# EAGLE board Relay_Shield (EAGLE 8.0.0)
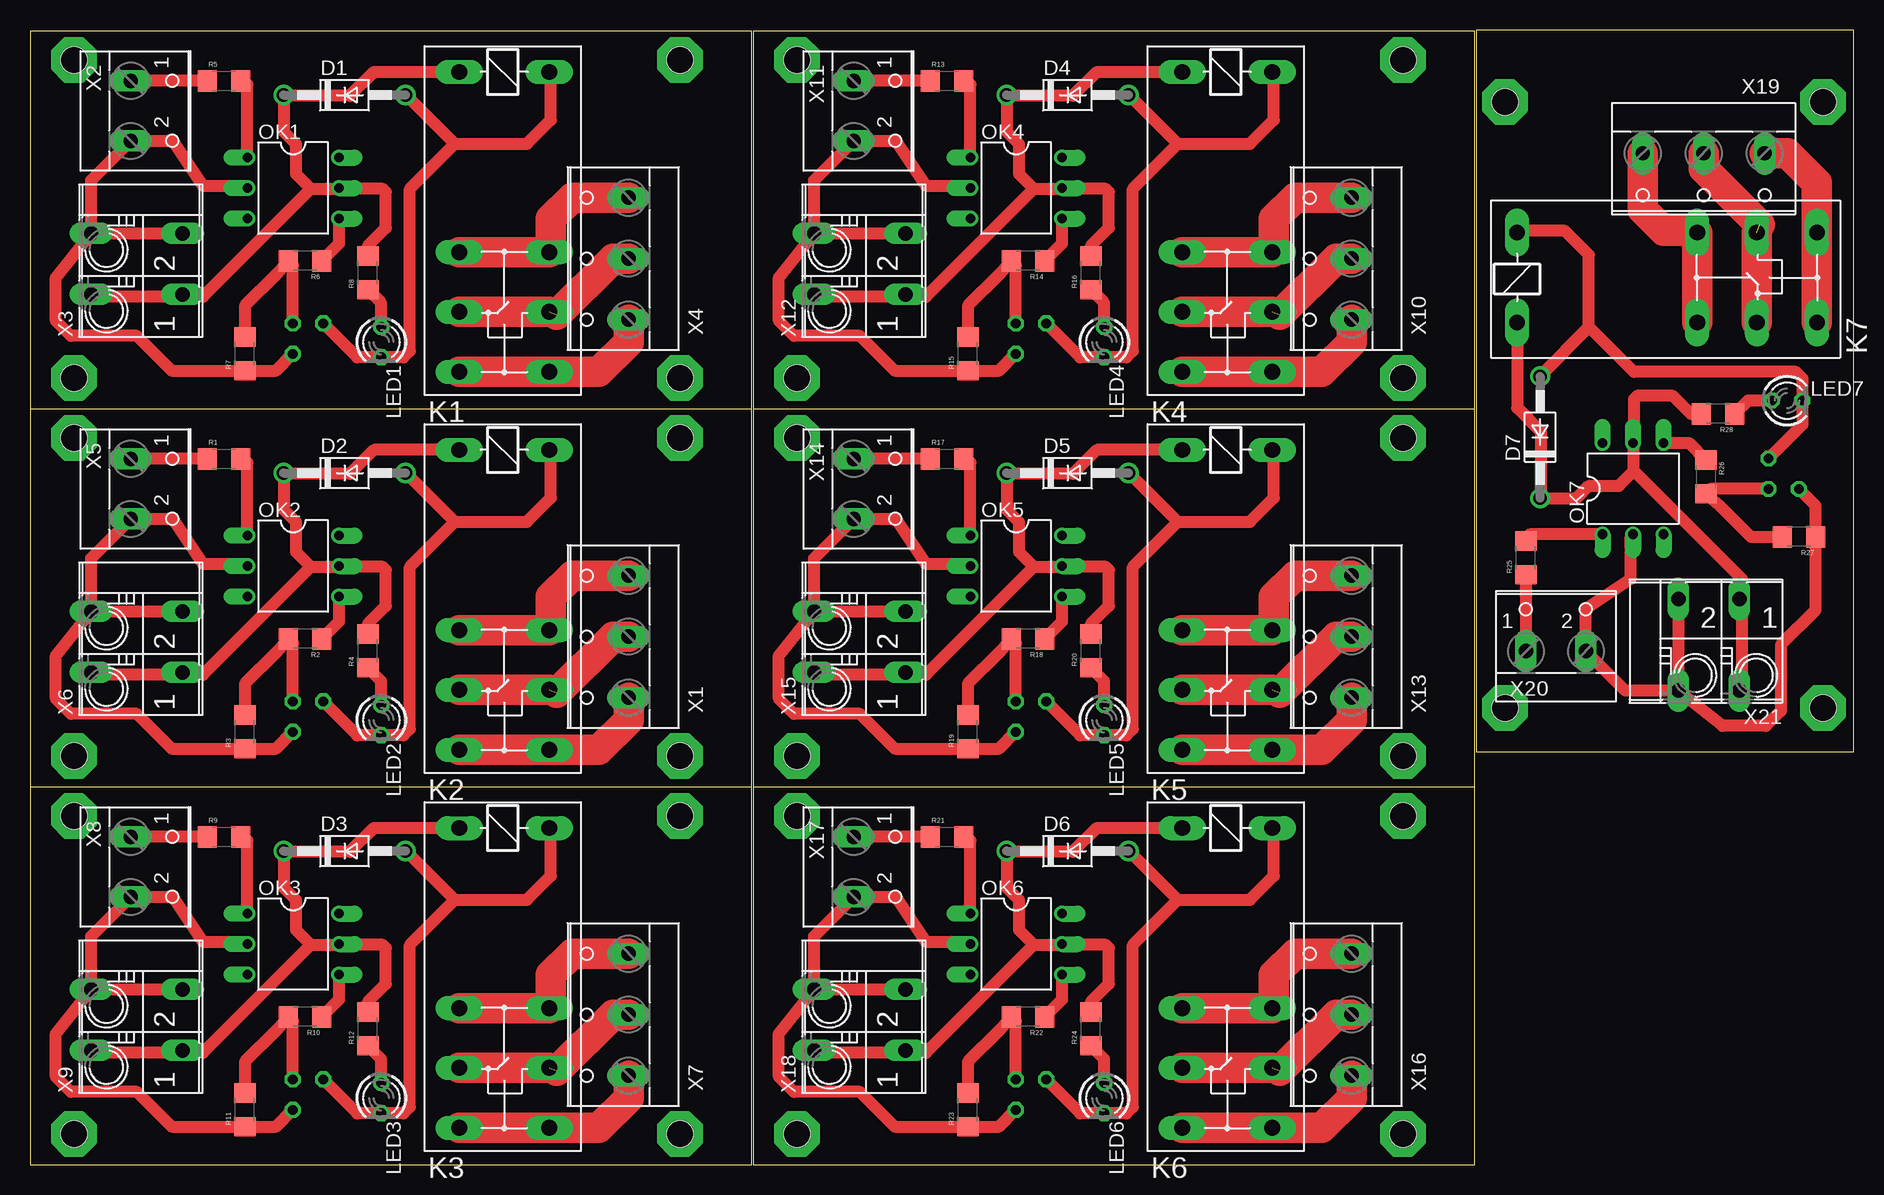
[diagram p0: board, top side]
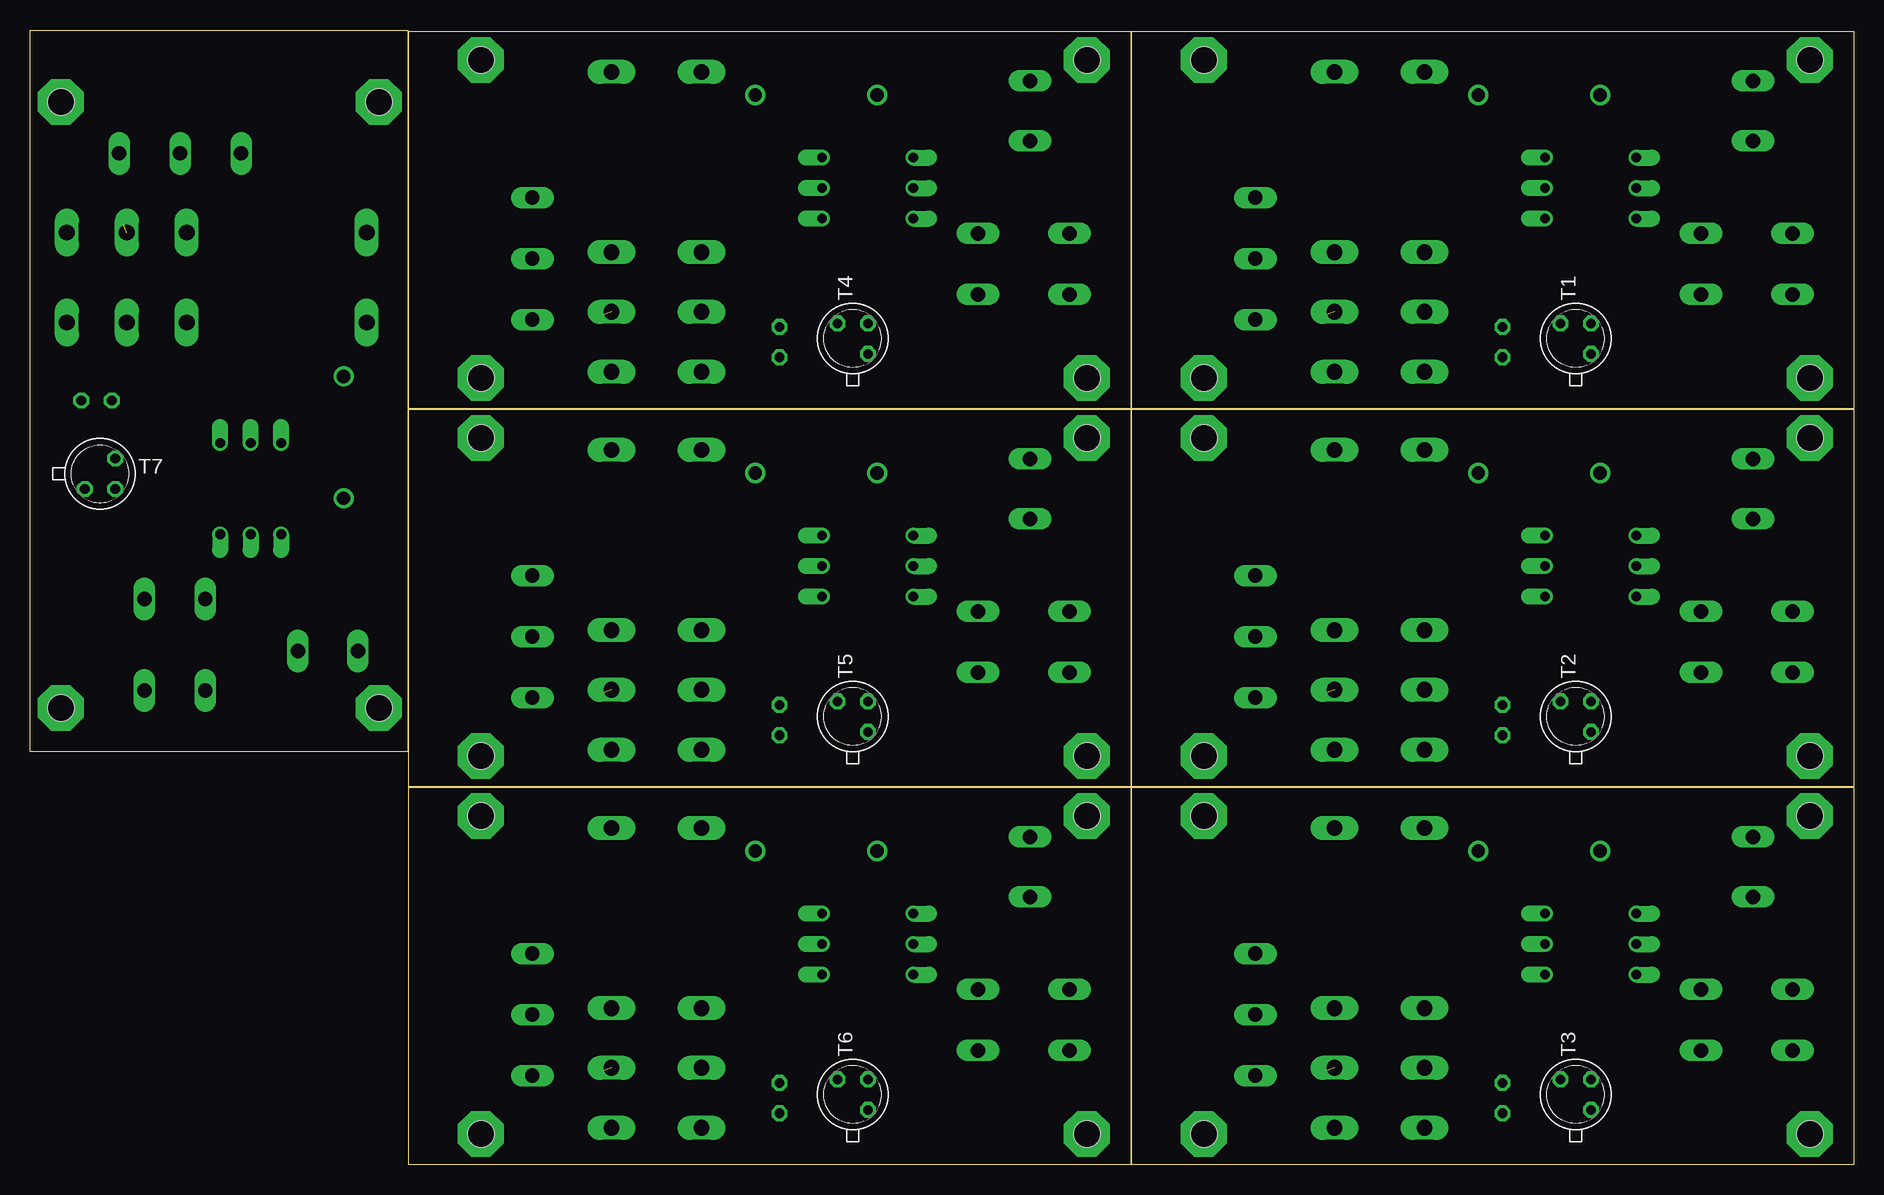
[diagram p1: board, bottom side, seen from below]

Size 151.98 x 94.56 mm. Coordinates in mm from the lower left corner, seen from the top.
Outline: 0,63 60.15,63 60.15,94.46 0,94.46 0,63
Outline: 0,31.5 60.15,31.5 60.15,62.96 0,62.96 0,31.5
Outline: 0,0 60.15,0 60.15,31.46 0,31.46 0,0
Outline: 60.25,63 120.4,63 120.4,94.46 60.25,94.46 60.25,63
Outline: 60.25,31.5 120.4,31.5 120.4,62.96 60.25,62.96 60.25,31.5
Outline: 60.25,0 120.4,0 120.4,31.46 60.25,31.46 60.25,0
Outline: 151.98,34.41 151.98,94.56 120.52,94.56 120.52,34.41 151.98,34.41
Copper layers (1*16): Top 0.035mm / dielectric 1.5mm / Bottom 0.035mm
Design rules "default *": minimum track width 10mil, minimum drill 24mil, track to track 15mil, track to pad 15mil, pad to pad 15mil, via to via 15mil, smd to smd 15mil, copper to edge 40mil, drill to drill 15mil, minimum pad ring 10mil, minimum via ring 8mil, stop-mask expansion 4mil, vias tented up to drill 0mil, thermal gap 10mil
Holes 2.2 mm at 54.16,92.07 54.16,65.57 3.66,65.57 3.66,92.07 54.16,60.57 54.16,34.07 3.66,34.07 3.66,60.57 54.16,29.07 54.16,2.57 3.66,2.57 3.66,29.07 114.41,92.07 114.41,65.57 63.91,65.57 63.91,92.07 114.41,60.57 114.41,34.07 63.91,34.07 63.91,60.57 114.41,29.07 114.41,2.57 63.91,2.57 63.91,29.07 122.91,88.57 149.41,88.57 149.41,38.07 122.91,38.07

## Footprints (pad centres in the part's own frame; a part is rotated, then mirrored left to right if it is on the bottom)
DO41-10 = drill 1.118: A 5.08,0; C -5.08,0
G2RE = drill 1.321 long: 1 -2.54,-3.683; 2 -2.54,3.81; O0 12.471,-3.683; O1 12.471,3.81; P0 17.45,-3.683; P1 17.45,3.81; S0 22.454,-3.683; S1 22.454,3.81
LED3MM = drill 0.813 octagon: A -1.27,0; K 1.27,0
DIL06 = drill 0.813 offset: 1 -2.54,-3.81; 2 0,-3.81; 3 2.54,-3.81; 4 2.54,3.81; 5 0,3.81; 6 -2.54,3.81
1206 = smd 1.6 x 1.8: 1 -1.4,0; 2 1.4,0
TO18 = drill 0.813 octagon: 1 -1.27,-1.27; 2 1.27,-1.27; 3 1.27,1.27
W237-3E = drill 1.194 long: 1 -5.08,-0.635; 2 0,-0.635; 3 5.08,-0.635
W237-102 = drill 1.194 long: 1 -2.5,-1.27; 2 2.5,-1.27
FFKV2 = drill 1.194 long: 1 -2.54,-3.81; 1A -2.54,3.81; 2 2.54,-3.81; 2A 2.54,3.81

## Placement (x,y rotation side)
D1  1N4004  [DO41-10]  26.21,89.14 0 top
D2  1N4004  [DO41-10]  26.21,57.64 0 top
D3  1N4004  [DO41-10]  26.21,26.14 0 top
D4  1N4004  [DO41-10]  86.46,89.14 0 top
D5  1N4004  [DO41-10]  86.46,57.64 0 top
D6  1N4004  [DO41-10]  86.46,26.14 0 top
D7  1N4004  [DO41-10]  125.84,60.62 90 top
K1  G2RE  [G2RE]  39.46,88.52 270 top
K2  G2RE  [G2RE]  39.46,57.02 270 top
K3  G2RE  [G2RE]  39.46,25.52 270 top
K4  G2RE  [G2RE]  99.71,88.52 270 top
K5  G2RE  [G2RE]  99.71,57.02 270 top
K6  G2RE  [G2RE]  99.71,25.52 270 top
K7  G2RE  [G2RE]  126.46,73.87 0 top
LED1  [LED3MM]  29.27,68.55 270 top
LED2  [LED3MM]  29.27,37.05 270 top
LED3  [LED3MM]  29.27,5.55 270 top
LED4  [LED3MM]  89.52,68.55 270 top
LED5  [LED3MM]  89.52,37.05 270 top
LED6  [LED3MM]  89.52,5.55 270 top
LED7  [LED3MM]  146.43,63.68 0 top
OK1  4N25M  [DIL06]  21.93,81.39 270 top
OK2  4N25M  [DIL06]  21.93,49.89 270 top
OK3  4N25M  [DIL06]  21.93,18.39 270 top
OK4  4N25M  [DIL06]  82.18,81.39 270 top
OK5  4N25M  [DIL06]  82.18,49.89 270 top
OK6  4N25M  [DIL06]  82.18,18.39 270 top
OK7  4N25M  [DIL06]  133.59,56.34 0 top
R1  1K  [1206]  16.16,58.82 0 top
R2  1K  [1206]  22.91,43.82 180 top
R3  10k  [1206]  17.91,36.07 90 top
R4  1.1K  [1206]  28.16,42.82 90 top
R5  1K  [1206]  16.16,90.32 0 top
R6  1K  [1206]  22.91,75.32 180 top
R7  10k  [1206]  17.91,67.57 90 top
R8  1.1K  [1206]  28.16,74.32 90 top
R9  1K  [1206]  16.16,27.32 0 top
R10  1K  [1206]  22.91,12.32 180 top
R11  10k  [1206]  17.91,4.57 90 top
R12  1.1K  [1206]  28.16,11.32 90 top
R13  1K  [1206]  76.41,90.32 0 top
R14  1K  [1206]  83.16,75.32 180 top
R15  10k  [1206]  78.16,67.57 90 top
R16  1.1K  [1206]  88.41,74.32 90 top
R17  1K  [1206]  76.41,58.82 0 top
R18  1K  [1206]  83.16,43.82 180 top
R19  10k  [1206]  78.16,36.07 90 top
R20  1.1K  [1206]  88.41,42.82 90 top
R21  1K  [1206]  76.41,27.32 0 top
R22  1K  [1206]  83.16,12.32 180 top
R23  10k  [1206]  78.16,4.57 90 top
R24  1.1K  [1206]  88.41,11.32 90 top
R25  1K  [1206]  124.66,50.57 90 top
R26  1K  [1206]  139.66,57.32 270 top
R27  10k  [1206]  147.41,52.32 180 top
R28  1.1K  [1206]  140.66,62.57 180 top
T1  2N2222  [TO18]  23.17,68.84 90 bottom
T2  2N2222  [TO18]  23.17,37.34 90 bottom
T3  2N2222  [TO18]  23.17,5.84 90 bottom
T4  2N2222  [TO18]  83.42,68.84 90 bottom
T5  2N2222  [TO18]  83.42,37.34 90 bottom
T6  2N2222  [TO18]  83.42,5.84 90 bottom
T7  2N2222  [TO18]  146.14,57.58 0 bottom
X1  [W237-3E]  49.24,44.01 90 top
X2  [W237-102]  9.66,87.82 270 top
X3  FFKV2  [FFKV2]  8.91,75.07 90 top
X4  [W237-3E]  49.24,75.51 90 top
X5  [W237-102]  9.66,56.32 270 top
X6  FFKV2  [FFKV2]  8.91,43.57 90 top
X7  [W237-3E]  49.24,12.51 90 top
X8  [W237-102]  9.66,24.82 270 top
X9  FFKV2  [FFKV2]  8.91,12.07 90 top
X10  [W237-3E]  109.49,75.51 90 top
X11  [W237-102]  69.91,87.82 270 top
X12  FFKV2  [FFKV2]  69.16,75.07 90 top
X13  [W237-3E]  109.49,44.01 90 top
X14  [W237-102]  69.91,56.32 270 top
X15  FFKV2  [FFKV2]  69.16,43.57 90 top
X16  [W237-3E]  109.49,12.51 90 top
X17  [W237-102]  69.91,24.82 270 top
X18  FFKV2  [FFKV2]  69.16,12.07 90 top
X19  [W237-3E]  139.47,83.65 180 top
X20  [W237-102]  127.16,44.07 0 top
X21  FFKV2  [FFKV2]  139.91,43.32 180 top

## Library data of the parts
D1-D7 = diode
K1-K7 = relay; OC_FARNELL: unknown; OC_NEWARK: unknown
LED1-LED7 = led
OK1-OK7 = optocoupler; MPN: 4N25-M; OC_FARNELL: 1021349; OC_NEWARK: 98K9084
R1-R28 = SparkFun-Passives
T1-T7 = transistor-neu-to92
X1 X4 X7 X10 X13 X16 X19 = con-wago-508; OC_FARNELL: unknown; OC_NEWARK: unknown
X2 X5 X8 X11 X14 X17 X20 = con-wago-500; MPN: 237-102; OC_FARNELL: unknown; OC_NEWARK: 70K9898
X3 X6 X9 X12 X15 X18 X21 = con-phoenix-508; OC_FARNELL: unknown; OC_NEWARK: unknown

## Nets
+24V: D1.C K1.1 OK1.5 R8.2 X3.1A
+24V1: D2.C K2.1 OK2.5 R4.2 X6.1A
+24V2: D3.C K3.1 OK3.5 R12.2 X9.1A
+24V3: D4.C K4.1 OK4.5 R16.2 X12.1A
+24V4: D5.C K5.1 OK5.5 R20.2 X15.1A
+24V5: D6.C K6.1 OK6.5 R24.2 X18.1A
+24V6: D7.C K7.1 OK7.5 R28.2 X21.1A
GND: OK1.2 R7.1 T1.1 X2.2 X3.2A
GND1: OK2.2 R3.1 T2.1 X5.2 X6.2A
GND2: OK3.2 R11.1 T3.1 X8.2 X9.2A
GND3: OK4.2 R15.1 T4.1 X11.2 X12.2A
GND4: OK5.2 R19.1 T5.1 X14.2 X15.2A
GND5: OK6.2 R23.1 T6.1 X17.2 X18.2A
GND6: OK7.2 R27.1 T7.1 X20.2 X21.2A
N$1: OK1.1 R5.2
N$2: OK1.4 R6.1
N$3: R6.2 R7.2 T1.2
N$4: R5.1 X2.1
N$5: D1.A K1.2 LED1.K T1.3
N$6: LED1.A R8.1
N$7: OK2.1 R1.2
N$8: K1.P0 K1.P1 X4.2
N$9: K1.O0 K1.O1 X4.3
N$10: K1.S0 K1.S1 X4.1
N$11: OK2.4 R2.1
N$12: R2.2 R3.2 T2.2
N$13: D2.A K2.2 LED2.K T2.3
N$14: LED2.A R4.1
N$15: K2.P0 K2.P1 X1.2
N$16: K2.O0 K2.O1 X1.3
N$17: K2.S0 K2.S1 X1.1
N$18: R1.1 X5.1
N$19: OK3.1 R9.2
N$20: OK3.4 R10.1
N$21: R10.2 R11.2 T3.2
N$22: D3.A K3.2 LED3.K T3.3
N$23: LED3.A R12.1
N$24: K3.P0 K3.P1 X7.2
N$25: K3.O0 K3.O1 X7.3
N$26: K3.S0 K3.S1 X7.1
N$27: R9.1 X8.1
N$28: OK4.1 R13.2
N$29: OK4.4 R14.1
N$30: R14.2 R15.2 T4.2
N$31: D4.A K4.2 LED4.K T4.3
N$32: LED4.A R16.1
N$33: K4.P0 K4.P1 X10.2
N$34: K4.O0 K4.O1 X10.3
N$35: K4.S0 K4.S1 X10.1
N$36: R13.1 X11.1
N$37: OK5.1 R17.2
N$38: OK5.4 R18.1
N$39: R18.2 R19.2 T5.2
N$40: D5.A K5.2 LED5.K T5.3
N$41: LED5.A R20.1
N$42: K5.P0 K5.P1 X13.2
N$43: K5.O0 K5.O1 X13.3
N$44: K5.S0 K5.S1 X13.1
N$45: R17.1 X14.1
N$46: OK6.1 R21.2
N$47: OK6.4 R22.1
N$48: R22.2 R23.2 T6.2
N$49: D6.A K6.2 LED6.K T6.3
N$50: LED6.A R24.1
N$51: K6.P0 K6.P1 X16.2
N$52: K6.O0 K6.O1 X16.3
N$53: K6.S0 K6.S1 X16.1
N$54: R21.1 X17.1
N$55: OK7.1 R25.2
N$56: OK7.4 R26.1
N$57: R26.2 R27.2 T7.2
N$58: D7.A K7.2 LED7.K T7.3
N$59: LED7.A R28.1
N$60: K7.P0 K7.P1 X19.2
N$61: K7.O0 K7.O1 X19.3
N$62: K7.S0 K7.S1 X19.1
N$63: R25.1 X20.1

## Tracks (layer width: path | path; a pad name or v marks a point on that pad's centre or on a via)
+24V
  Top 0.61: 35.77,91.07 K1.1 | 25.67,81.32 OK1.5 25.81,81.32 | 5.14,72.32 X3.1A | 29.66,81.07 29.41,81.32
  Top 0.813: R8.2 28.16,76.57 | 21.2,89.07 D1.C
  Top 1.016: D1.C 21.13,86.1 22.16,85.07 22.16,82.57 23.41,81.32 | 23.41,81.32 25.67,81.32 | 23.41,81.32 14.41,72.32 5.14,72.32 | 28.16,76.57 29.66,78.07 29.66,81.07 | 29.41,81.32 25.81,81.32 | K1.1 28.65,91.06 26.66,89.07 21.2,89.07
+24V1
  Top 0.61: 35.77,59.57 K2.1 | 25.67,49.82 OK2.5 25.81,49.82 | 5.14,40.82 X6.1A | 29.66,49.57 29.41,49.82
  Top 0.813: R4.2 28.16,45.07 | 21.2,57.57 D2.C
  Top 1.016: D2.C 21.13,54.6 22.16,53.57 22.16,51.07 23.41,49.82 | 23.41,49.82 25.67,49.82 | 23.41,49.82 14.41,40.82 5.14,40.82 | 28.16,45.07 29.66,46.57 29.66,49.57 | 29.41,49.82 25.81,49.82 | K2.1 28.65,59.56 26.66,57.57 21.2,57.57
+24V2
  Top 0.61: 35.77,28.07 K3.1 | 25.67,18.32 OK3.5 25.81,18.32 | 4.89,9.32 X9.1A | 29.66,18.07 29.41,18.32
  Top 0.813: R12.2 28.16,13.57 | 21.2,26.07 D3.C
  Top 1.016: D3.C 21.13,23.1 22.16,22.07 22.16,19.57 23.41,18.32 | 23.41,18.32 25.67,18.32 | 23.41,18.32 14.41,9.32 4.89,9.32 | 28.16,13.57 29.66,15.07 29.66,18.07 | 29.41,18.32 25.81,18.32 | K3.1 28.65,28.06 26.66,26.07 21.2,26.07
+24V3
  Top 0.61: 96.02,91.07 K4.1 | 85.92,81.32 OK4.5 86.06,81.32 | 65.39,72.32 X12.1A | 89.91,81.07 89.66,81.32
  Top 0.813: R16.2 88.41,76.57 | 81.45,89.07 D4.C
  Top 1.016: D4.C 81.38,86.1 82.41,85.07 82.41,82.57 83.66,81.32 | 83.66,81.32 85.92,81.32 | 83.66,81.32 74.66,72.32 65.39,72.32 | 88.41,76.57 89.91,78.07 89.91,81.07 | 89.66,81.32 86.06,81.32 | K4.1 88.9,91.06 86.91,89.07 81.45,89.07
+24V4
  Top 0.61: 96.02,59.57 K5.1 | 85.92,49.82 OK5.5 86.06,49.82 | 65.64,40.82 X15.1A | 89.91,49.57 89.66,49.82
  Top 0.813: R20.2 88.41,45.07 | 81.45,57.57 D5.C
  Top 1.016: D5.C 81.38,54.6 82.41,53.57 82.41,51.07 83.66,49.82 | 83.66,49.82 85.92,49.82 | 83.66,49.82 74.66,40.82 65.64,40.82 | 88.41,45.07 89.91,46.57 89.91,49.57 | 89.66,49.82 86.06,49.82 | K5.1 88.9,59.56 86.91,57.57 81.45,57.57
+24V5
  Top 0.61: 96.02,28.07 K6.1 | 85.92,18.32 OK6.5 86.06,18.32 | 65.64,9.32 X18.1A | 89.91,18.07 89.66,18.32
  Top 0.813: R24.2 88.41,13.57 | 81.45,26.07 D6.C
  Top 1.016: D6.C 81.38,23.1 82.41,22.07 82.41,19.57 83.66,18.32 | 83.66,18.32 85.92,18.32 | 83.66,18.32 74.66,9.32 65.64,9.32 | 88.41,13.57 89.91,15.07 89.91,18.07 | 89.66,18.32 86.06,18.32 | K6.1 88.9,28.06 86.91,26.07 81.45,26.07
+24V6
  Top 0.61: 123.91,70.18 K7.1 | 133.66,60.08 OK7.5 133.66,60.22 | 142.66,39.55 X21.1A | 133.91,64.07 133.66,63.82
  Top 0.813: R28.2 138.41,62.57 | 125.91,55.61 D7.C
  Top 1.016: D7.C 128.88,55.54 129.91,56.57 132.41,56.57 133.66,57.82 | 133.66,57.82 133.66,60.08 | 133.66,57.82 142.66,48.82 142.66,39.55 | 138.41,62.57 136.91,64.07 133.91,64.07 | 133.66,63.82 133.66,60.22 | K7.1 123.92,63.06 125.91,61.07 125.91,55.61
GND
  Top 1.016: X3.2A 2.16,73.92 2.16,70.32 3.41,69.07 8.91,69.07 11.81,66.17 R7.1 20.5,66.17 T1.1 | OK1.2 17.94,81.57 14.41,81.57 11.91,85.32 X2.2 5.1,82.03 X3.2A | X3.2A 12.66,77.61 12.66,77.57
GND1
  Top 1.016: X6.2A 2.16,42.42 2.16,38.82 3.41,37.57 8.91,37.57 11.81,34.67 R3.1 20.5,34.67 T2.1 | OK2.2 17.94,50.07 14.41,50.07 11.91,53.82 X5.2 5.1,50.53 X6.2A | X6.2A 12.66,46.11 12.66,46.07 12.91,46.07
GND2
  Top 1.016: X9.2A 2.16,10.92 2.16,7.32 3.41,6.07 8.91,6.07 11.81,3.17 R11.1 20.5,3.17 T3.1 | OK3.2 17.94,18.57 14.41,18.57 11.91,22.32 X8.2 5.1,19.03 X9.2A | X9.2A 12.66,14.61 12.66,14.57
GND3
  Top 1.016: X12.2A 62.41,73.92 62.41,70.32 63.66,69.07 69.16,69.07 72.06,66.17 R15.1 80.75,66.17 T4.1 | OK4.2 78.19,81.57 74.66,81.57 72.16,85.32 X11.2 65.35,82.03 X12.2A | X12.2A 72.91,77.61 72.91,77.57
GND4
  Top 1.016: X15.2A 62.41,42.42 62.41,38.82 63.66,37.57 69.16,37.57 72.06,34.67 R19.1 80.75,34.67 T5.1 | OK5.2 78.19,50.07 74.66,50.07 72.16,53.82 X14.2 65.35,50.53 X15.2A | X15.2A 72.91,46.11 72.91,46.07
GND5
  Top 1.016: X18.2A 62.41,10.92 62.41,7.32 63.66,6.07 69.16,6.07 72.06,3.17 R23.1 80.75,3.17 T6.1 | OK6.2 78.19,18.57 74.66,18.57 72.16,22.32 X17.2 65.35,19.03 X18.2A | X18.2A 72.91,14.61 72.91,14.57
GND6
  Top 1.016: X21.2A 141.06,36.57 144.66,36.57 145.91,37.82 145.91,43.32 148.81,46.22 R27.1 148.81,54.91 T7.1 | OK7.2 133.41,52.35 133.41,48.82 129.66,46.32 X20.2 132.95,39.51 X21.2A | X21.2A 137.41,39.51 137.41,47.07
N$1
  Top 1.016: OK1.1 18.12,90.01 R5.2
N$2
  Top 1.016: OK1.4 25.74,76.75 R6.1
N$3
  Top 0.61: R7.2 18.01,69.07
  Top 0.813: 21.9,74.93 R6.2
  Top 1.016: R6.2 20.51,74.17 17.91,71.57 R7.2 | T1.2 21.9,74.93
N$4
  Top 1.016: R5.1 X2.1
N$5
  Top 0.61: D1.A 31.34,89.14 | 43.41,90.92 K1.2
  Top 1.016: 35.41,85.07 31.34,89.14 | 35.41,85.07 41.41,85.07 43.41,87.07 43.41,90.92 | 35.41,85.07 31.66,81.32 31.66,67.82 31.12,67.28 LED1.K 27.27,67.28 T1.3
N$6
  Top 1.016: LED1.A 29.27,71.81 R8.1
N$7
  Top 1.016: OK2.1 18.12,58.51 R1.2
N$8  (1 unrouted)
  Top 2.54: K1.P1 K1.P0 | X4.2 48.6,75.51 43.91,70.82
N$9
  Top 2.54: K1.O0 K1.O1 43.41,76.19 43.41,78.82 45.18,80.59 X4.3
N$10
  Top 2.54: K1.S0 K1.S1 47.41,66.07 49.88,68.53 X4.1
N$11
  Top 1.016: OK2.4 25.74,45.25 R2.1
N$12
  Top 0.61: R3.2 18.01,37.57
  Top 0.813: 21.9,43.43 R2.2
  Top 1.016: R2.2 20.51,42.67 17.91,40.07 R3.2 | T2.2 21.9,43.43
N$13
  Top 0.61: D2.A 31.34,57.64 | 43.41,59.42 K2.2
  Top 1.016: 35.41,53.57 31.34,57.64 | 35.41,53.57 41.41,53.57 43.41,55.57 43.41,59.42 | 35.41,53.57 31.66,49.82 31.66,36.32 31.12,35.78 LED2.K 27.27,35.78 T2.3
N$14
  Top 1.016: LED2.A 29.27,40.31 R4.1
N$15  (1 unrouted)
  Top 2.54: K2.P1 K2.P0 | X1.2 48.6,44.01 43.91,39.32
N$16
  Top 2.54: K2.O0 K2.O1 43.41,44.69 43.41,47.32 45.18,49.09 X1.3
N$17
  Top 2.54: K2.S0 K2.S1 47.41,34.57 49.88,37.03 X1.1
N$18
  Top 1.016: R1.1 X5.1
N$19
  Top 1.016: OK3.1 18.12,27.01 R9.2
N$20
  Top 1.016: OK3.4 25.74,13.75 R10.1
N$21
  Top 0.61: R11.2 18.01,6.07
  Top 0.813: 21.9,11.93 R10.2
  Top 1.016: R10.2 20.51,11.17 17.91,8.57 R11.2 | T3.2 21.9,11.93
N$22
  Top 0.61: D3.A 31.34,26.14 | 43.41,27.92 K3.2
  Top 1.016: 35.41,22.07 31.34,26.14 | 35.41,22.07 41.41,22.07 43.41,24.07 43.41,27.92 | 35.41,22.07 31.66,18.32 31.66,4.82 31.12,4.28 LED3.K 27.27,4.28 T3.3
N$23
  Top 1.016: LED3.A 29.27,8.81 R12.1
N$24  (1 unrouted)
  Top 2.54: K3.P1 K3.P0 | X7.2 48.6,12.51 43.91,7.82
N$25
  Top 2.54: K3.O0 K3.O1 43.41,13.19 43.41,15.82 45.18,17.59 X7.3
N$26
  Top 2.54: K3.S0 K3.S1 47.41,3.07 49.88,5.54 X7.1
N$27
  Top 1.016: R9.1 X8.1
N$28
  Top 1.016: OK4.1 78.37,90.01 R13.2
N$29
  Top 1.016: OK4.4 85.99,76.75 R14.1
N$30
  Top 0.61: R15.2 78.26,69.07
  Top 0.813: 82.15,74.93 R14.2
  Top 1.016: R14.2 80.76,74.17 78.16,71.57 R15.2 | T4.2 82.15,74.93
N$31
  Top 0.61: D4.A 91.59,89.14 | 103.66,90.92 K4.2
  Top 1.016: 95.66,85.07 91.59,89.14 | 95.66,85.07 101.66,85.07 103.66,87.07 103.66,90.92 | 95.66,85.07 91.91,81.32 91.91,67.82 91.37,67.28 LED4.K 87.52,67.28 T4.3
N$32
  Top 1.016: LED4.A 89.52,71.81 R16.1
N$33  (1 unrouted)
  Top 2.54: K4.P1 K4.P0 | X10.2 108.85,75.51 104.16,70.82
N$34
  Top 2.54: K4.O0 K4.O1 103.66,76.19 103.66,78.82 105.43,80.59 X10.3
N$35
  Top 2.54: K4.S0 K4.S1 107.66,66.07 110.12,68.53 X10.1
N$36
  Top 1.016: R13.1 X11.1
N$37
  Top 1.016: OK5.1 78.37,58.51 R17.2
N$38
  Top 1.016: OK5.4 85.99,45.25 R18.1
N$39
  Top 0.61: R19.2 78.26,37.57
  Top 0.813: 82.15,43.43 R18.2
  Top 1.016: R18.2 80.76,42.67 78.16,40.07 R19.2 | T5.2 82.15,43.43
N$40
  Top 0.61: D5.A 91.59,57.64 | 103.66,59.42 K5.2
  Top 1.016: 95.66,53.57 91.59,57.64 | 95.66,53.57 101.66,53.57 103.66,55.57 103.66,59.42 | 95.66,53.57 91.91,49.82 91.91,36.32 91.37,35.78 LED5.K 87.52,35.78 T5.3
N$41
  Top 1.016: LED5.A 89.52,40.31 R20.1
N$42  (1 unrouted)
  Top 2.54: K5.P1 K5.P0 | X13.2 108.85,44.01 104.16,39.32
N$43
  Top 2.54: K5.O0 K5.O1 103.66,44.69 103.66,47.32 105.43,49.09 X13.3
N$44
  Top 2.54: K5.S0 K5.S1 107.66,34.57 110.12,37.03 X13.1
N$45
  Top 1.016: R17.1 X14.1
N$46
  Top 1.016: OK6.1 78.37,27.01 R21.2
N$47
  Top 1.016: OK6.4 85.99,13.75 R22.1
N$48
  Top 0.61: R23.2 78.26,6.07
  Top 0.813: 82.15,11.93 R22.2
  Top 1.016: R22.2 80.76,11.17 78.16,8.57 R23.2 | T6.2 82.15,11.93
N$49
  Top 0.61: D6.A 91.59,26.14 | 103.66,27.92 K6.2
  Top 1.016: 95.66,22.07 91.59,26.14 | 95.66,22.07 101.66,22.07 103.66,24.07 103.66,27.92 | 95.66,22.07 91.91,18.32 91.91,4.82 91.37,4.28 LED6.K 87.52,4.28 T6.3
N$50
  Top 1.016: LED6.A 89.52,8.81 R24.1
N$51  (1 unrouted)
  Top 2.54: K6.P1 K6.P0 | X16.2 108.85,12.51 104.16,7.82
N$52
  Top 2.54: K6.O0 K6.O1 103.66,13.19 103.66,15.82 105.43,17.59 X16.3
N$53
  Top 2.54: K6.S0 K6.S1 107.66,3.07 110.12,5.54 X16.1
N$54
  Top 1.016: R21.1 X17.1
N$55
  Top 1.016: OK7.1 124.97,52.53 R25.2
N$56
  Top 1.016: OK7.4 138.23,60.15 R26.1
N$57
  Top 0.61: R27.2 145.91,52.42
  Top 0.813: 140.05,56.31 R26.2
  Top 1.016: R26.2 140.81,54.92 143.41,52.32 R27.2 | T7.2 140.05,56.31
N$58
  Top 0.61: D7.A 125.84,65.75 | 124.06,77.82 K7.2
  Top 1.016: 129.91,69.82 125.84,65.75 | 129.91,69.82 129.91,75.82 127.91,77.82 124.06,77.82 | 129.91,69.82 133.66,66.07 147.16,66.07 147.7,65.53 LED7.K 147.7,61.68 T7.3
N$59
  Top 1.016: LED7.A 143.17,63.68 R28.1
N$60  (1 unrouted)
  Top 2.54: K7.P1 K7.P0 | X19.2 139.47,83.01 144.16,78.32
N$61
  Top 2.54: K7.O0 K7.O1 138.79,77.82 136.16,77.82 134.39,79.59 X19.3
N$62
  Top 2.54: K7.S0 K7.S1 148.91,81.82 146.44,84.28 X19.1
N$63
  Top 1.016: R25.1 X20.1
S$1  (via drill 2 pad 3.81)
  other vias: 3.66,92.07
S$2  (via drill 2 pad 3.81)
  other vias: 3.66,65.57
S$3  (via drill 2 pad 3.81)
  other vias: 54.16,92.07
S$4  (via drill 2 pad 3.81)
  other vias: 54.16,65.57
S$5  (via drill 2 pad 3.81)
  other vias: 63.91,92.07
S$6  (via drill 2 pad 3.81)
  other vias: 63.91,65.57
S$7  (via drill 2 pad 3.81)
  other vias: 63.91,60.57
S$8  (via drill 2 pad 3.81)
  other vias: 54.16,60.57
S$9  (via drill 2 pad 3.81)
  other vias: 114.41,92.07
S$10  (via drill 2 pad 3.81)
  other vias: 114.41,65.57
S$11  (via drill 2 pad 3.81)
  other vias: 114.41,60.57
S$12  (via drill 2 pad 3.81)
  other vias: 122.91,88.57
S$13  (via drill 2 pad 3.81)
  other vias: 149.41,88.57
S$14  (via drill 2 pad 3.81)
  other vias: 3.66,60.57
S$15  (via drill 2 pad 3.81)
  other vias: 3.66,34.07
S$16  (via drill 2 pad 3.81)
  other vias: 3.66,29.07
S$17  (via drill 2 pad 3.81)
  other vias: 63.91,29.07
S$18  (via drill 2 pad 3.81)
  other vias: 63.91,34.07
S$19  (via drill 2 pad 3.81)
  other vias: 54.16,34.07
S$20  (via drill 2 pad 3.81)
  other vias: 54.16,29.07
S$21  (via drill 2 pad 3.81)
  other vias: 3.66,2.57
S$22  (via drill 2 pad 3.81)
  other vias: 54.16,2.57
S$23  (via drill 2 pad 3.81)
  other vias: 63.91,2.57
S$24  (via drill 2 pad 3.81)
  other vias: 114.41,2.57
S$25  (via drill 2 pad 3.81)
  other vias: 114.41,29.07
S$26  (via drill 2 pad 3.81)
  other vias: 114.41,34.07
S$27  (via drill 2 pad 3.81)
  other vias: 122.91,38.07
S$28  (via drill 2 pad 3.81)
  other vias: 149.41,38.07